# Altium PCB PCB1.PcbDoc (part 2 of 2)
Units mm, origin at the board's own origin, x right, y up, seen from the top; angles counter-clockwise.
Board outline 193 x 120 mm, 2 copper layers (Top Layer, Bottom Layer); 109 components, 163 nets, 596 pads, 0 vias.
Unrouted connection lines stored in the file: 2.
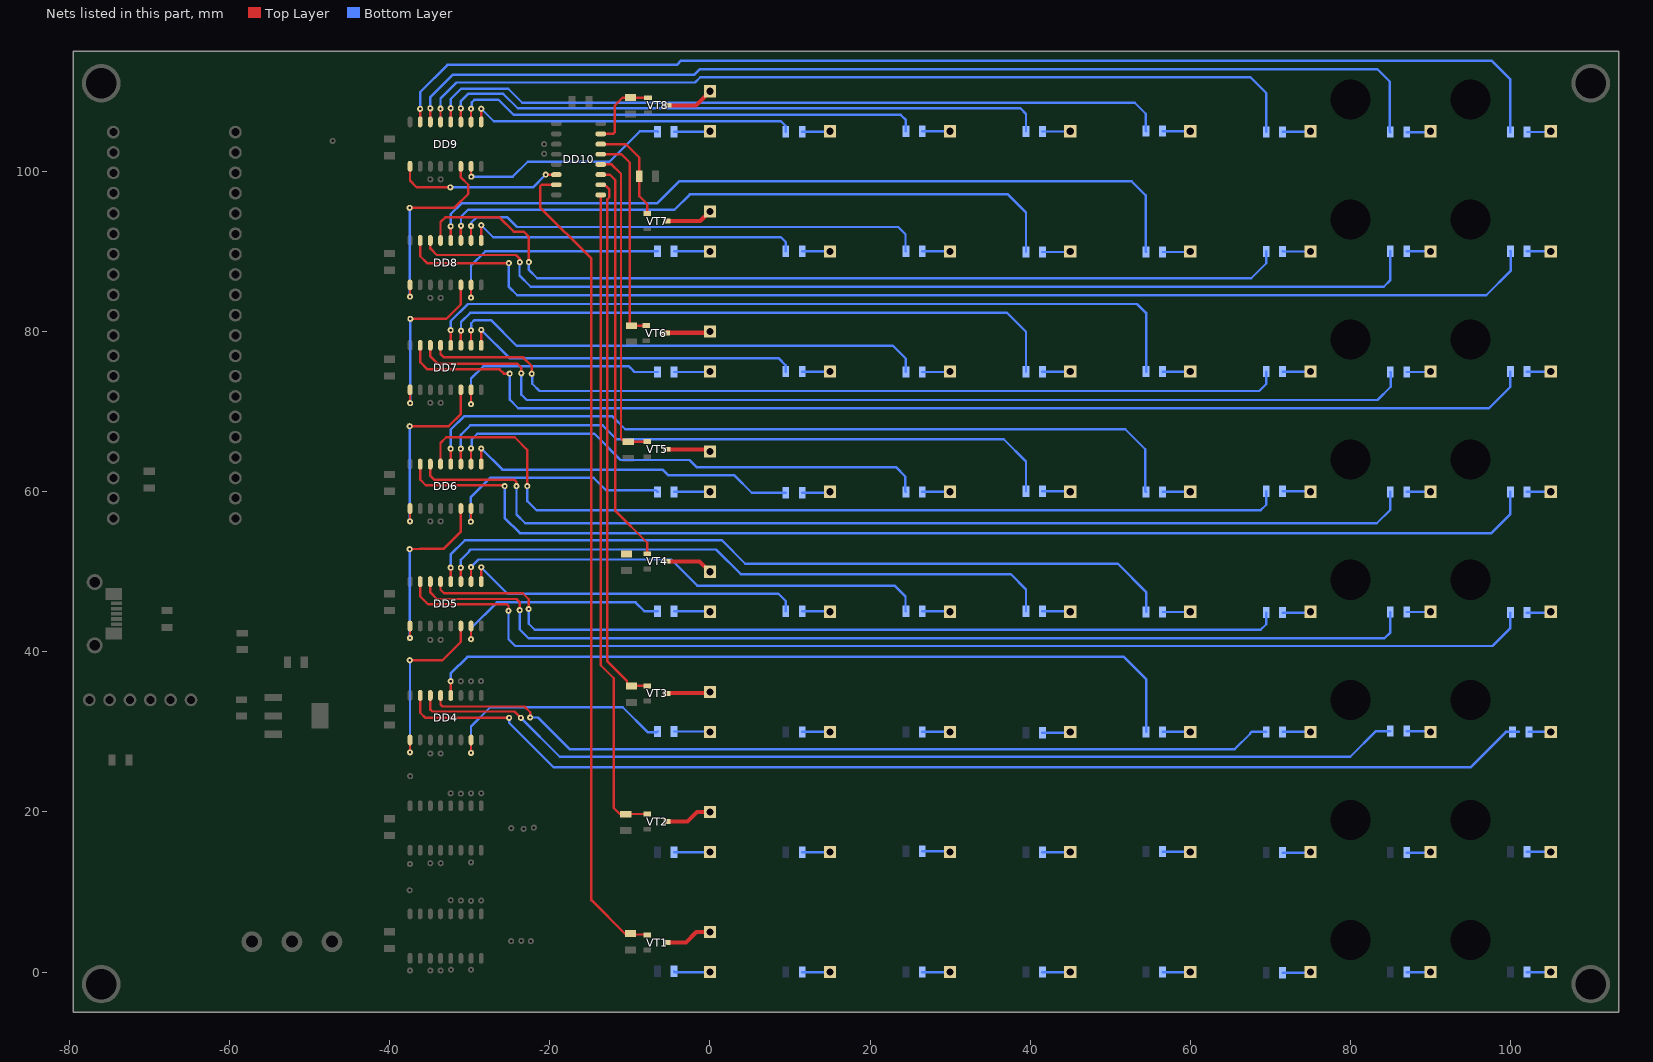
[diagram p2: the nets of this part, all layers, seen from the top]

## Nets (pads, with @x,y where several pads share a name; then routed paths per layer and width w, separated by ;. In a path a pad name is that pad's centre, name@x,y a point inside that pad or via, vN(x,y) a via of type N, cw(c..) or ccw(c..) an arc to the next point about the centre after c; other vN are vias at no path point) (continued)
NetDD4_4: DD4.4 pad.95@-32.375,36.325 R59.1 | length 98.2
  Top Layer w0.3: pad.95@-32.375,36.325 -32.365,36.115 DD4.4@-32.365,34.55
  Bottom Layer w0.3: pad.95@-32.375,36.325 -32.375,37.275 -30.275,39.375 51.7,39.375 54.475,36.6 R59.1@54.475,30
NetDD4_5: DD4.5 pad.95@-22.45,31.8 R61.1 | length 107.9
  Top Layer w0.3: DD4.5@-33.635,34.55 -33.635,33.41 -33.4,33.175 -23.15,33.175 -22.425,32.45 -22.425,31.825 pad.95@-22.45,31.8
  Bottom Layer w0.3: pad.95@-22.45,31.8 -21.475,31.8 -17.525,27.85 65.55,27.85 67.475,29.775 67.475,29.824 67.651,30 R61.1@69.475,30
NetDD4_6: DD4.6 pad.95@-23.6,31.75 R63.1 | length 125.4
  Top Layer w0.3: DD4.6@-34.905,34.55 -34.905,32.78 -34.675,32.55 -24.4,32.55 pad.95@-23.6,31.75
  Bottom Layer w0.3: pad.95@-23.6,31.75 -18.75,26.9 79.975,26.9 83.175,30.1 R63.1@84.975,30.1
NetDD4_7: DD4.7 pad.95@-25.075,31.75 R65.1 | length 144.4
  Top Layer w0.3: DD4.7@-36.175,34.55 -36.175,32.4 -35.525,31.75 pad.95@-25.075,31.75
  Bottom Layer w0.3: pad.95@-25.075,31.75 -25.075,31.15 -19.5,25.575 94.975,25.575 99.4,30 101.025,30
NetDD4_9: DD4.9 DD5.14 pad.95@-37.445,27.45 pad.95@-37.475,38.95 | length 22.6
  Top Layer w0.3: pad.95@-37.475,38.95 -33.4,38.95 -31.095,41.255 DD5.14@-31.095,43.225 ; pad.95@-37.445,27.45 DD4.9@-37.445,29
  Bottom Layer w0.3: pad.95@-37.475,38.95 pad.95@-37.445,38.95 ; pad.95@-37.445,27.45 pad.95@-37.445,38.95 ; pad.95@-37.445,38.95 -37.445,39.02 -37.375,38.95 pad.95@-37.445,38.95
NetDD4_15: DD4.15 pad.95@-29.825,27.375 R51.1 | length 30.5
  Top Layer w0.3: pad.95@-29.825,27.375 DD4.15@-29.825,29
  Bottom Layer w0.3: pad.95@-29.825,27.375 -29.825,30.675 -27.425,33.075 -10.875,33.075 -7.775,29.975 -6.6,29.975 R51.1@-6.525,30.05
NetDD5_1: DD5.1 pad.95@-28.55,50.55 R7.1 | length 42.9
  Top Layer w0.3: pad.95@-28.575,50.475 pad.95@-28.55,50.55 DD5.1@-28.555,48.775
  Bottom Layer w0.3: pad.95@-28.55,50.55 -25.25,47.25 8.575,47.25 9.475,46.35 R7.1@9.475,45.075
NetDD5_2: DD5.2 pad.95@-29.825,50.575 R10.1 | length 60.2
  Top Layer w0.3: DD5.2@-29.825,48.775 pad.95@-29.825,50.575
  Bottom Layer w0.3: pad.95@-29.825,50.575 -28.875,51.525 -4.825,51.525 -1.575,48.275 23.05,48.275 24.425,46.9 24.425,45.125 R10.1@24.475,45.075
NetDD5_3: DD5.3 pad.95@-31.095,50.505 R13.1 | length 78.7
  Top Layer w0.3: DD5.3@-31.095,48.775 pad.95@-31.095,50.505 pad.95@-31.075,50.525
  Bottom Layer w0.3: pad.95@-31.095,50.505 -31.095,51.505 -30.05,52.55 -30.05,52.599 -29.874,52.775 0.775,52.775 3.85,49.7 37.575,49.7 39.475,47.8 R13.1@39.475,45.075
NetDD5_4: DD5.4 pad.95@-32.365,50.515 R16.1 | length 96.2
  Top Layer w0.3: pad.95@-32.375,50.525 pad.95@-32.365,50.515 DD5.4@-32.365,48.775
  Bottom Layer w0.3: pad.95@-32.365,50.515 -32.375,50.525 -32.375,52.15 -30.6,53.925 1.5,53.925 4.425,51 50.95,51 54.475,47.475 R16.1@54.475,44.975
NetDD5_5: DD5.5 pad.95@-22.625,45.35 R19.1 | length 109.7
  Top Layer w0.3: DD5.5@-33.635,48.775 -33.635,47.76 -33.2,47.325 -23.375,47.325 -22.625,46.575 pad.95@-22.625,45.35
  Bottom Layer w0.3: pad.95@-22.625,45.35 -22.625,43.5 -21.875,42.75 68.775,42.75 69.475,43.45 R19.1@69.475,44.9
NetDD5_6: DD5.6 pad.95@-23.75,45.2 R22.1 | length 128.5
  Top Layer w0.3: DD5.6@-34.905,48.775 -34.905,47.405 -34.1,46.6 -24.15,46.6 -23.725,46.175 -23.725,45.225 pad.95@-23.75,45.2
  Bottom Layer w0.3: pad.95@-23.75,45.2 -23.75,42.8 -22.625,41.675 84.225,41.675 84.975,42.425 R22.1@84.975,44.975
NetDD5_7: DD5.7 pad.95@-25.15,45.125 R25.1 | length 145.9
  Top Layer w0.3: DD5.7@-36.175,48.775 -36.175,46.925 -35.2,45.95 -25.35,45.95 -25.15,45.75 pad.95@-25.15,45.125
  Bottom Layer w0.3: pad.95@-25.15,45.125 -25.15,41.575 -24.3,40.725 97.725,40.725 99.975,42.975 R25.1@99.975,44.9
NetDD5_9: DD5.9 DD6.14 pad.95@-37.5,52.825 pad.95@-37.45,41.725 | length 22.8
  Top Layer w0.3: pad.95@-37.5,52.825 -36.15,52.85 -33.275,52.85 -31.095,55.03 DD6.14@-31.095,57.9 ; pad.95@-37.45,41.725 -37.445,41.73 DD5.9@-37.445,43.225
  Bottom Layer w0.3: pad.95@-37.5,52.825 -37.475,41.75 pad.95@-37.45,41.725
NetDD5_15: DD5.15 pad.95@-29.825,41.575 R4.1 | length 28.1
  Top Layer w0.3: pad.95@-29.825,41.575 DD5.15@-29.825,43.225
  Bottom Layer w0.3: pad.95@-29.825,41.575 -29.825,42.95 -26.6,46.175 -9.275,46.175 -8.175,45.075 R4.1@-6.525,45.075
NetDD6_1: DD6.1 pad.95@-28.555,65.395 R31.1 | length 42.3
  Top Layer w0.3: DD6.1@-28.555,63.45 pad.95@-28.555,65.395 pad.95@-28.55,65.4
  Bottom Layer w0.3: pad.95@-28.555,65.395 -25.91,62.75 -5.9,62.75 -5.181,62.031 3.069,62.031 5.225,59.875 R31.1@9.475,59.875
NetDD6_2: DD6.2 pad.95@-29.825,65.4 R34.1 | length 61.7
  Top Layer w0.3: DD6.2@-29.825,63.45 pad.95@-29.825,65.4
  Bottom Layer w0.3: pad.95@-29.825,65.4 -29.75,65.475 -29.75,66.525 -29.05,67.225 -14.425,67.225 -11.15,63.95 -2.525,63.95 -1.65,63.075 23.225,63.075 24.4,61.9 24.4,60.05 R34.1@24.475,59.975
NetDD6_3: DD6.3 pad.95@-31.095,65.37 R37.1 | length 80.3
  Top Layer w0.3: pad.95@-31.1,65.375 pad.95@-31.095,65.37 DD6.3@-31.095,63.45
  Bottom Layer w0.3: pad.95@-31.095,65.37 -31.095,67.105 -29.925,68.275 -13.375,68.275 -11.65,66.55 36.7,66.55 39.475,63.775 R37.1@39.475,60.05
NetDD6_4: DD6.4 pad.95@-32.375,65.375 R40.1 | length 98.8
  Top Layer w0.3: pad.95@-32.375,65.375 -32.365,65.365 DD6.4@-32.365,63.45
  Bottom Layer w0.3: pad.95@-32.375,65.375 -32.375,67.725 -30.7,69.4 -12.175,69.4 -10.575,67.8 51.875,67.8 54.375,65.3 54.375,60.075 R40.1@54.475,59.975
NetDD6_5: DD6.5 pad.95@-22.8,60.7 R43.1 | length 115.5
  Top Layer w0.3: DD6.5@-33.635,63.45 -33.635,66.09 -32.925,66.8 -24.375,66.8 -22.8,65.225 pad.95@-22.8,60.7
  Bottom Layer w0.3: pad.95@-22.8,60.7 -22.8,58.825 -21.65,57.675 68.775,57.675 69.475,58.375 R43.1@69.475,60.05
NetDD6_6: DD6.6 pad.95@-24.15,60.7 R46.1 | length 129.1
  Top Layer w0.3: DD6.6@-34.905,63.45 -34.905,61.976 -34.429,61.5 -24.425,61.5 -24.15,61.225 pad.95@-24.15,60.7
  Bottom Layer w0.3: pad.95@-24.15,60.7 -24.15,57.15 -23.05,56.05 83.275,56.05 84.975,57.75 R46.1@84.975,59.975
NetDD6_7: DD6.7 pad.95@-25.625,60.7 R49.1 | length 146.9
  Top Layer w0.3: DD6.7@-36.175,63.45 -36.175,61.5 -35.475,60.8 -25.85,60.8 pad.95@-25.625,60.7
  Bottom Layer w0.3: pad.95@-25.625,60.7 -25.625,56.725 -23.725,54.825 97.6,54.825 99.975,57.2 R49.1@99.975,59.975
NetDD6_9: DD6.9 DD7.14 pad.95@-37.5,68.175 pad.95@-37.45,56.3 | length 23.5
  Top Layer w0.3: pad.95@-37.5,68.175 -32.625,68.175 -31.095,69.705 DD7.14@-31.095,72.725 ; pad.95@-37.45,56.3 -37.445,56.305 DD6.9@-37.445,57.9
  Bottom Layer w0.3: pad.95@-37.5,68.175 -37.475,56.325 pad.95@-37.45,56.3
NetDD6_15: DD6.15 pad.95@-29.85,56.25 R28.1 | length 29.8
  Top Layer w0.3: pad.95@-29.85,56.25 -29.825,56.275 DD6.15@-29.825,57.9
  Bottom Layer w0.3: pad.95@-29.85,56.25 -29.85,59.325 -27.45,61.725 -14.5,61.725 -12.95,60.175 -6.725,60.175 R28.1@-6.525,59.975
NetDD7_1: DD7.1 pad.95@-28.55,80.2 R54.1 | length 42.6
  Top Layer w0.3: DD7.1@-28.555,78.275 -28.555,80.195 pad.95@-28.55,80.2
  Bottom Layer w0.3: pad.95@-28.55,80.2 -25.025,76.675 8.575,76.675 9.475,75.775 R54.1@9.475,75
NetDD7_2: DD7.2 pad.95@-29.825,80.15 R56.1 | length 60.8
  Top Layer w0.3: DD7.2@-29.825,78.275 pad.95@-29.825,80.15
  Bottom Layer w0.3: pad.95@-29.825,80.15 -29.8,80.175 -29.8,81.025 -29.4,81.425 -27.35,81.425 -24.15,78.225 22.85,78.225 24.475,76.6 R56.1@24.475,74.95
NetDD7_3: DD7.3 pad.95@-31.075,80.1 R58.1 | length 79.9
  Top Layer w0.3: DD7.3@-31.095,78.275 -31.095,80.08 pad.95@-31.075,80.1
  Bottom Layer w0.3: pad.95@-31.075,80.1 -31.075,81.175 -29.9,82.35 37.1,82.35 39.476,79.974 39.476,77.75 ; R58.1@39.475,74.975 39.475,77.749
NetDD7_4: DD7.4 pad.95@-32.365,80.175 R60.1 | length 98.5
  Top Layer w0.3: DD7.4@-32.365,78.275 pad.95@-32.365,80.175
  Bottom Layer w0.3: pad.95@-32.365,80.175 -32.375,80.185 -32.375,81.275 -30.21,83.44 53.36,83.44 54.475,82.325 R60.1@54.475,75
NetDD7_5: DD7.5 pad.95@-22.25,74.725 R62.1 | length 109.3
  Top Layer w0.3: DD7.5@-33.635,78.275 -33.635,77.21 -33.2,76.775 -23.325,76.775 -22.25,75.7 pad.95@-22.25,74.725
  Bottom Layer w0.3: pad.95@-22.25,74.725 -22.175,74.65 -22.175,73.475 -21.275,72.575 68.6,72.575 69.475,73.45 R62.1@69.475,75
NetDD7_6: DD7.6 pad.95@-23.55,74.775 R64.1 | length 128.1
  Top Layer w0.3: DD7.6@-34.905,78.275 -34.905,76.88 -34.025,76 -24.05,76 -23.55,75.5 pad.95@-23.55,74.775
  Bottom Layer w0.3: pad.95@-23.55,74.775 -23.55,72.125 -22.875,71.45 83.375,71.45 85.025,73.1 85.025,74.9 R64.1@84.975,74.95
NetDD7_7: DD7.7 pad.95@-25,74.75 R66.1 | length 145.5
  Top Layer w0.3: DD7.7@-36.175,78.275 -36.175,76.175 -35.275,75.275 -26.25,75.275 -25.725,74.75 pad.95@-25,74.75
  Bottom Layer w0.3: pad.95@-25,74.75 -25,71.5 -23.925,70.425 97.3,70.425 99.975,73.1 R66.1@99.975,75
NetDD7_9: DD7.9 DD8.14 pad.95@-37.4,81.575 pad.95@-37.425,71.05 | length 21.7
  Top Layer w0.3: DD7.9@-37.445,72.725 -37.445,71.07 pad.95@-37.425,71.05 ; pad.95@-37.4,81.575 -37,81.6 -32.9,81.6 -31.095,83.405 DD8.14@-31.095,85.825
  Bottom Layer w0.3: pad.95@-37.425,71.05 -37.412,71.063 pad.95@-37.4,81.575
NetDD7_15: DD7.15 pad.95@-29.825,70.925 R52.1 | length 29.3
  Top Layer w0.3: DD7.15@-29.825,72.725 pad.95@-29.825,70.925 pad.95@-29.8,70.9
  Bottom Layer w0.3: pad.95@-29.825,70.925 -29.825,74.125 -28.3,75.65 -10.1,75.65 -9.951,75.501 -9.4,74.95 R52.1@-6.525,74.95
NetDD8_1: DD8.1 pad.95@-28.55,93.275 R8.1 | length 41.9
  Top Layer w0.3: DD8.1@-28.555,91.375 -28.555,93.27 pad.95@-28.55,93.275
  Bottom Layer w0.3: pad.95@-28.55,93.275 -27.05,91.775 8.875,91.775 9.475,91.175 R8.1@9.475,90.025
NetDD8_2: DD8.2 pad.95@-29.825,93.175 R11.1 | length 59.7
  Top Layer w0.3: DD8.2@-29.825,91.375 pad.95@-29.825,93.175
  Bottom Layer w0.3: pad.95@-29.825,93.175 -29.819,93.181 -29.819,93.581 -29.15,94.25 -25.275,94.25 -24.075,93.05 23.525,93.05 24.425,92.15 24.425,90.075 R11.1@24.475,90.025
NetDD8_3: DD8.3 pad.95@-31.075,93.2 R14.1 | length 80.6
  Top Layer w0.3: DD8.3@-31.095,91.375 -31.095,93.18 pad.95@-31.075,93.2
  Bottom Layer w0.3: pad.95@-31.075,93.2 -31.075,94.325 -30.2,95.2 -4.425,95.2 -2.5,97.125 37.225,97.125 39.475,94.875 R14.1@39.475,89.925
NetDD8_4: DD8.4 pad.95@-32.365,93.135 R17.1 | length 99.6
  Top Layer w0.3: DD8.4@-32.365,91.375 pad.95@-32.365,93.135 pad.95@-32.35,93.15
  Bottom Layer w0.3: pad.95@-32.365,93.135 -32.365,94.66 -31.025,96 -6.6,96 -3.85,98.75 52.675,98.75 54.425,97 54.425,89.975 R17.1@54.475,89.925
NetDD8_5: DD8.5 pad.95@-22.6,88.675 R20.1 | length 113.5
  Top Layer w0.3: DD8.5@-33.635,91.375 -33.635,93.665 -33.05,94.25 -26.275,94.25 -24.5,92.475 -23.25,92.475 -22.6,91.825 pad.95@-22.6,88.675
  Bottom Layer w0.3: pad.95@-22.6,88.675 -22.6,87.7 -21.55,86.65 67.6,86.65 69.475,88.525 R20.1@69.475,90
NetDD8_6: DD8.6 pad.95@-23.725,88.65 R23.1 | length 128.1
  Top Layer w0.3: DD8.6@-34.905,91.375 -34.905,90.355 -34.1,89.55 -24.201,89.55 -23.725,89.074 pad.95@-23.725,88.65
  Bottom Layer w0.3: pad.95@-23.725,88.65 -23.775,88.6 -23.775,87 -22.375,85.6 84.15,85.6 84.975,86.425 R23.1@84.975,90.025
NetDD8_7: DD8.7 pad.95@-25.1,88.55 R26.1 | length 145.6
  Top Layer w0.3: DD8.7@-36.175,91.375 -36.175,89.4 -35.325,88.55 pad.95@-25.1,88.55
  Bottom Layer w0.3: pad.95@-25.1,88.55 -25.1,85.575 -24.05,84.525 96.95,84.525 100,87.575 100,90 R26.1@99.975,90.025
NetDD8_9: DD8.9 DD9.14 pad.95@-37.5,95.45 pad.95@-37.445,84.355 | length 24.4
  Top Layer w0.3: pad.95@-37.5,95.45 -36.675,95.475 -31.875,95.475 -30.175,97.175 -30.175,98.325 -31.095,99.245 DD9.14@-31.095,100.625 ; pad.95@-37.445,84.355 DD8.9@-37.445,85.825
  Bottom Layer w0.3: pad.95@-37.5,95.45 -37.473,84.383 pad.95@-37.445,84.355
NetDD8_15: DD8.15 pad.95@-29.825,84.225 R5.1 | length 29.6
  Top Layer w0.3: pad.95@-29.825,84.225 DD8.15@-29.825,85.825
  Bottom Layer w0.3: pad.95@-29.825,84.225 -29.825,88.225 -28.025,90.025 R5.1@-6.525,90.025
NetDD9_1: DD9.1 pad.95@-28.552,107.822 R32.1 | length 41.3
  Top Layer w0.3: DD9.1@-28.555,106.175 -28.555,107.82 pad.95@-28.552,107.822 pad.95@-28.55,107.825
  Bottom Layer w0.3: pad.95@-28.552,107.822 -26.98,106.25 8.875,106.25 9.475,105.65 R32.1@9.475,104.95
NetDD9_2: DD9.2 pad.95@-29.825,107.825 R35.1 | length 59.3
  Top Layer w0.3: DD9.2@-29.825,106.175 pad.95@-29.825,107.825
  Bottom Layer w0.3: pad.95@-29.825,107.825 -29.737,107.913 -29.737,108.613 -29.4,108.95 -26.4,108.95 -24.525,107.075 23.825,107.075 24.475,106.425 R35.1@24.475,105
NetDD9_3: DD9.3 pad.95@-31.095,107.87 R38.1 | length 76.8
  Top Layer w0.3: pad.95@-31.1,107.875 pad.95@-31.095,107.87 DD9.3@-31.095,106.175
  Bottom Layer w0.3: pad.95@-31.095,107.87 -31.095,108.78 -30.2,109.675 -25.8,109.675 -24,107.875 38.775,107.875 39.475,107.175 R38.1@39.475,104.975
NetDD9_4: DD9.4 pad.95@-32.365,107.885 R41.1 | length 93.7
  Top Layer w0.3: DD9.4@-32.365,106.175 pad.95@-32.365,107.885 pad.95@-32.35,107.9
  Bottom Layer w0.3: pad.95@-32.365,107.885 -32.365,109.035 -31.074,110.326 -30.826,110.326 ; -30.825,110.325 -25.175,110.325 -23.425,108.575 53.05,108.575 54.425,107.2 54.425,105.075 R41.1@54.475,105.025
NetDD9_5: DD9.5 pad.95@-33.635,107.84 R44.1 | length 112.8
  Top Layer w0.3: DD9.5@-33.635,106.175 pad.95@-33.635,107.84 pad.95@-33.625,107.85
  Bottom Layer w0.3: pad.95@-33.635,107.84 -33.635,109.115 -31.65,111.1 -1.85,111.1 -1.2,111.75 67.5,111.75 69.5,109.75 69.5,104.95 R44.1@69.475,104.925
NetDD9_6: DD9.6 pad.95@-34.905,107.87 R47.1 | length 131.4
  Top Layer w0.3: DD9.6@-34.905,106.175 pad.95@-34.905,107.87 pad.95@-34.9,107.875
  Bottom Layer w0.3: pad.95@-34.905,107.87 -34.905,109.27 -32.125,112.05 -1.975,112.05 -1.25,112.775 83.35,112.775 84.925,111.2 84.925,104.95 R47.1@84.975,104.9
NetDD9_7: DD9.7 pad.95@-36.175,107.8 R50.1 | length 149
  Top Layer w0.3: DD9.7@-36.175,106.175 pad.95@-36.175,107.8
  Bottom Layer w0.3: pad.95@-36.175,107.8 -36.175,109.9 -32.775,113.3 -4.125,113.3 -3.6,113.825 97.625,113.825 99.975,111.475 R50.1@99.975,104.9
NetDD9_9: DD9.9 DD10.14 pad.95@-20.5,99.6 pad.95@-32.4,98 | length 21.1
  Top Layer w0.3: DD9.9@-37.445,100.625 -37.445,98.845 -36.6,98 pad.95@-32.4,98 ; pad.95@-20.5,99.6 -20.495,99.595 DD10.14@-19.175,99.595
  Bottom Layer w0.3: pad.95@-32.4,98 -22.1,98 pad.95@-20.5,99.6
NetDD9_15: DD9.15 pad.95@-29.787,99.338 R29.1 | length 27
  Top Layer w0.3: DD9.15@-29.825,100.625 -29.825,99.375 pad.95@-29.787,99.338 pad.95@-29.75,99.3
  Bottom Layer w0.3: pad.95@-29.787,99.338 -24.613,99.338 -22.75,101.2 -12.55,101.2 -8.75,105 -6.575,105 R29.1@-6.525,104.95
NetDD10_1: DD10.1 R68.2 VT2.1 | length 81.7
  Top Layer w0.3: DD10.1@-13.625,97.055 -13.625,38.325 -12,36.7 -12,20.5 -11.25,19.75 VT2.1@-7.825,19.75
NetDD10_2: DD10.2 R69.2 VT3.1 | length 66.8
  Top Layer w0.3: DD10.2@-13.625,98.325 -13.169,98.325 -13.019,98.175 -12.976,98.175 -12.546,97.745 -12.546,96.763 -12.8,96.509 -12.8,38.8 -10.343,36.343 -10.343,36 -10.068,35.725 R69.2@-9.8,35.725 -9.25,35.725 -9.248,35.75 -9.124,35.75 -8.15,35.75 VT3.1@-7.825,35.75
NetDD10_3: DD10.3 R70.2 VT4.1 | length 50.4
  Top Layer w0.3: DD10.3@-13.625,99.595 -12.495,99.595 -11.8,98.9 -11.8,57.6 -7.825,53.625 VT4.1@-7.825,52.25
NetDD10_4: DD10.4 R71.2 VT5.1 | length 39.5
  Top Layer w0.3: DD10.4@-13.625,100.865 -12.265,100.865 -11.1,99.7 -11.1,66.676 -10.924,66.5 -10.475,66.5 R71.2@-10.2,66.225 -10.188,66.238 -7.912,66.238 -7.875,66.2 VT5.1@-7.825,66.25
NetDD10_5: DD10.5 R72.2 VT6.1 | length 26.8
  Top Layer w0.3: DD10.5@-13.625,102.135 -11.035,102.135 -10,101.1 -10,80.925 R72.2@-9.8,80.725 -9.788,80.738 -7.937,80.738 VT6.1@-7.925,80.75 -8.1,80.75 VT6.1@-8.25,80.9
NetDD10_6: DD10.6 R73.2 VT7.1 | length 12.9
  Top Layer w0.3: DD10.6@-13.625,103.405 -10.505,103.405 -8.8,101.7 -8.8,96.9 -7.825,95.925 VT7.1@-7.825,94.75
NetDD10_7: DD10.7 R74.2 VT8.1 | length 9.7
  Top Layer w0.3: DD10.7@-13.625,104.675 -12.076,104.675 -11.9,104.851 -11.9,108.2 -10.9,109.2 VT8.1@-7.725,109.2
NetDD10_15: DD10.15 R67.2 VT1.1 | length 102.7
  Top Layer w0.3: DD10.15@-19.175,98.325 -21.024,98.325 -21.2,98.149 -21.2,95.5 -14.8,89.1 -14.8,9 -10.5,4.7 -7.875,4.7 VT1.1@-7.825,4.65
NetR3_2: pad.1 R3.2 | length 4.5
  Bottom Layer w0.3: R3.2@-4.475,0.1 -4.375,0 pad.1@0,0
NetR4_2: pad.25 R4.2 | length 4.5
  Bottom Layer w0.3: R4.2@-4.475,45.075 -0.075,45.075 pad.25@0,45
NetR5_2: pad.49 R5.2 | length 4.5
  Bottom Layer w0.3: R5.2@-4.475,90.025 -0.025,90.025 pad.49@0,90
NetR6_2: pad.2 R6.2 | length 3.5
  Bottom Layer w0.3: R6.2@11.525,0 pad.2@15,0
NetR7_2: pad.26 R7.2 | length 3.5
  Bottom Layer w0.3: R7.2@11.525,45.075 14.925,45.075 pad.26@15,45
NetR8_2: pad.50 R8.2 | length 3.5
  Bottom Layer w0.3: R8.2@11.525,90.025 14.975,90.025 pad.50@15,90
NetR9_2: pad.3 R9.2 | length 3.5
  Bottom Layer w0.3: R9.2@26.525,0 pad.3@30,0
NetR10_2: pad.27 R10.2 | length 3.5
  Bottom Layer w0.3: R10.2@26.525,45.075 29.925,45.075 pad.27@30,45
NetR11_2: pad.51 R11.2 | length 3.5
  Bottom Layer w0.3: R11.2@26.525,90.025 29.975,90.025 pad.51@30,90
NetR12_2: pad.4 R12.2 | length 3.5
  Bottom Layer w0.3: R12.2@41.525,0 pad.4@45,0
NetR13_2: pad.28 R13.2 | length 3.5
  Bottom Layer w0.3: R13.2@41.525,45.075 44.925,45.075 pad.28@45,45
NetR14_2: pad.52 R14.2 | length 3.5
  Bottom Layer w0.3: R14.2@41.525,89.925 44.925,89.925 pad.52@45,90
NetR15_2: pad.5 R15.2 | length 3.5
  Bottom Layer w0.3: R15.2@56.525,0 pad.5@60,0
NetR16_2: pad.29 R16.2 | length 3.5
  Bottom Layer w0.3: R16.2@56.525,44.975 59.975,44.975 pad.29@60,45
NetR17_2: pad.53 R17.2 | length 3.5
  Bottom Layer w0.3: R17.2@56.525,89.925 59.925,89.925 pad.53@60,90
NetR18_2: pad.6 R18.2 | length 3.5
  Bottom Layer w0.3: R18.2@71.525,-0.075 74.925,-0.075 pad.6@75,0
NetR19_2: pad.30 R19.2 | length 3.5
  Bottom Layer w0.3: R19.2@71.525,44.9 74.9,44.9 pad.30@75,45
NetR20_2: pad.54 R20.2 | length 3.5
  Bottom Layer w0.3: R20.2@71.525,90 pad.54@75,89.975
NetR21_2: pad.7 R21.2 | length 3
  Bottom Layer w0.3: R21.2@87.025,0 pad.7@90,0
NetR22_2: pad.31 R22.2 | length 3
  Bottom Layer w0.3: R22.2@87.025,44.975 89.975,44.975 pad.31@90,45
NetR23_2: pad.55 R23.2 | length 3
  Bottom Layer w0.3: R23.2@87.025,90.025 pad.55@90,90
NetR24_2: pad.8 R24.2 | length 3
  Bottom Layer w0.3: R24.2@102.025,0 pad.8@105,0
NetR25_2: pad.32 R25.2 | length 3
  Bottom Layer w0.3: R25.2@102.025,44.9 104.9,44.9 pad.32@105,45
NetR26_2: pad.56 R26.2 | length 3
  Bottom Layer w0.3: R26.2@102.025,90.025 pad.56@105,90
NetR27_2: pad.9 R27.2 | length 4.5
  Bottom Layer w0.3: R27.2@-4.475,14.975 -0.025,14.975 pad.9@0,15
NetR28_2: pad.33 R28.2 | length 4.5
  Bottom Layer w0.3: R28.2@-4.475,59.975 -4.45,60 pad.33@0,60
NetR29_2: pad.57 R29.2 | length 4.5
  Bottom Layer w0.3: R29.2@-4.475,104.95 -0.05,104.95 pad.57@0,105
NetR30_2: pad.10 R30.2 | length 3.5
  Bottom Layer w0.3: R30.2@11.525,14.975 14.975,14.975 pad.10@15,15
NetR31_2: pad.34 R31.2 | length 3.5
  Bottom Layer w0.3: R31.2@11.525,59.875 14.875,59.875 pad.34@15,60
NetR32_2: pad.58 R32.2 | length 3.5
  Bottom Layer w0.3: R32.2@11.525,104.95 14.95,104.95 pad.58@15,105
NetR33_2: pad.11 R33.2 | length 3.5
  Bottom Layer w0.3: R33.2@26.525,15.1 29.9,15.1 pad.11@30,15
NetR34_2: pad.35 R34.2 | length 3.5
  Bottom Layer w0.3: R34.2@26.525,59.975 29.975,59.975 pad.35@30,60
NetR35_2: pad.59 R35.2 | length 3.5
  Bottom Layer w0.3: R35.2@26.525,105 pad.59@30,105
NetR36_2: pad.12 R36.2 | length 3.5
  Bottom Layer w0.3: R36.2@41.525,14.975 44.975,14.975 pad.12@45,15
NetR37_2: pad.36 R37.2 | length 3.5
  Bottom Layer w0.3: R37.2@41.525,60.05 44.95,60.05 pad.36@45,60
NetR38_2: pad.60 R38.2 | length 3.5
  Bottom Layer w0.3: R38.2@41.525,104.975 44.975,104.975 pad.60@45,105
NetR39_2: pad.13 R39.2 | length 3.5
  Bottom Layer w0.3: R39.2@56.525,15.05 59.95,15.05 pad.13@60,15
NetR40_2: pad.37 R40.2 | length 3.5
  Bottom Layer w0.3: R40.2@56.525,59.975 59.975,59.975 pad.37@60,60
NetR41_2: pad.61 R41.2 | length 3.5
  Bottom Layer w0.3: R41.2@56.525,105.025 59.975,105.025 pad.61@60,105
NetR42_2: pad.14 R42.2 | length 3.5
  Bottom Layer w0.3: R42.2@71.525,14.925 74.925,14.925 pad.14@75,15
NetR43_2: pad.38 R43.2 | length 3.5
  Bottom Layer w0.3: R43.2@71.525,60.05 74.95,60.05 pad.38@75,60
NetR44_2: pad.62 R44.2 | length 3.5
  Bottom Layer w0.3: R44.2@71.525,104.925 74.925,104.925 pad.62@75,105
NetR45_2: pad.15 R45.2 | length 3
  Bottom Layer w0.3: R45.2@87.025,14.925 89.925,14.925 pad.15@90,15
NetR46_2: pad.39 R46.2 | length 3
  Bottom Layer w0.3: R46.2@87.025,59.975 89.975,59.975 pad.39@90,60
NetR47_2: pad.63 R47.2 | length 3
  Bottom Layer w0.3: R47.2@87.025,104.9 89.9,104.9 pad.63@90,105
NetR48_2: pad.16 R48.2 | length 3
  Bottom Layer w0.3: R48.2@102.025,15.025 104.975,15.025 pad.16@105,15
NetR49_2: pad.40 R49.2 | length 3
  Bottom Layer w0.3: R49.2@102.025,59.975 104.975,59.975 pad.40@105,60
NetR50_2: pad.64 R50.2 | length 3
  Bottom Layer w0.254: R50.2@102.025,104.9 104.9,104.9 pad.64@105,105
NetR51_2: pad.17 R51.2 | length 4.5
  Bottom Layer w0.3: R51.2@-4.475,30.05 -0.05,30.05 pad.17@0,30
NetR52_2: pad.41 R52.2 | length 4.5
  Bottom Layer w0.3: R52.2@-4.475,74.95 -0.05,74.95 pad.41@0,75
NetR53_2: pad.18 R53.2 | length 3.5
  Bottom Layer w0.3: R53.2@11.525,30 pad.18@15,30
NetR54_2: pad.42 R54.2 | length 3.5
  Bottom Layer w0.3: R54.2@11.525,75 pad.42@15,75
NetR55_2: pad.19 R55.2 | length 3.5
  Bottom Layer w0.3: R55.2@26.525,30 pad.19@30,30
NetR56_2: pad.43 R56.2 | length 3.5
  Bottom Layer w0.3: R56.2@26.525,74.95 29.95,74.95 pad.43@30,75
NetR57_2: pad.20 R57.2 | length 3.5
  Bottom Layer w0.3: R57.2@41.525,29.9 44.9,29.9 pad.20@45,30
NetR58_2: pad.44 R58.2 | length 3.5
  Bottom Layer w0.3: R58.2@41.525,74.975 44.975,74.975 pad.44@45,75
NetR59_2: pad.21 R59.2 | length 3.5
  Bottom Layer w0.3: R59.2@56.525,30 pad.21@60,30
NetR60_2: pad.45 R60.2 | length 3.5
  Bottom Layer w0.3: R60.2@56.525,75 pad.45@60,75
NetR61_2: pad.22 R61.2 | length 3.5
  Bottom Layer w0.3: R61.2@71.525,30 pad.22@75,30
NetR62_2: pad.46 R62.2 | length 3.5
  Bottom Layer w0.3: R62.2@71.525,75 pad.46@75,75
NetR63_2: pad.23 R63.2 | length 3
  Bottom Layer w0.3: R63.2@87.025,30.1 89.9,30.1 pad.23@90,30
NetR64_2: pad.47 R64.2 | length 3
  Bottom Layer w0.3: R64.2@87.025,74.95 89.95,74.95 pad.47@90,75
NetR65_2: pad.24 R65.2 | length 2.7
  Bottom Layer w0.3: R65.2@102.275,30 pad.24@105,30
NetR66_2: pad.48 R66.2 | length 3
  Bottom Layer w0.3: R66.2@102.025,75 pad.48@105,75
NetVT1_3: pad.65 VT1.3 | length 5.9
  Top Layer w0.51: VT1.3@-5.375,3.7 -3,3.7 -1.7,5 pad.65@0,5
NetVT2_3: pad.66 VT2.3 | length 5.9
  Top Layer w0.51: VT2.3@-5.375,18.8 -2.8,18.8 -1.6,20 pad.66@0,20
NetVT3_3: pad.67 VT3.3 | length 5.5
  Top Layer w0.51: VT3.3@-5.375,34.8 -5.33,34.845 -0.155,34.845 pad.67@0,35
NetVT4_3: pad.68 VT4.3 | length 5.9
  Top Layer w0.51: VT4.3@-5.375,51.3 -1.3,51.3 pad.68@0,50
NetVT5_3: pad.69 VT5.3 | length 5.5
  Top Layer w0.51: VT5.3@-5.375,65.3 -5.33,65.255 -0.255,65.255 pad.69@0,65
NetVT6_3: pad.70 VT6.3 | length 5.6
  Top Layer w0.51: VT6.3@-5.475,79.8 -5.43,79.845 -0.155,79.845 pad.70@0,80
NetVT7_3: pad.71 VT7.3 | length 5.9
  Top Layer w0.51: VT7.3@-5.375,93.8 -1.2,93.8 pad.71@0,95
NetVT8_3: pad.72 VT8.3 | length 6
  Top Layer w0.51: VT8.3@-5.275,108.25 -1.75,108.25 pad.72@0,110
pads on no net: DD1.1 DD1.2 DD1.3 DD1.4 DD1.9 DD1.10 DD1.11 DD1.12 DD1.13 DD1.17 DD1.18 DD1.21 DD1.24 DD1.25 DD1.26 DD1.27 DD1.28 DD1.29 DD1.30 DD1.31 DD1.32 DD1.33 DD1.34 DD1.35 DD1.36 DD1.37 DD1.38 DD1.39 DD1.40 DD10.9 U1.1 U1.6 XS1.2 XS1.3 XS1.4

## Polygon pours and split planes (outlines as drawn)
GND on Top Layer "GND_L01_P002" (solid, pour order 2): -79.5,-5 113.5,-5 113.5,115 -79.5,115
GND on Bottom Layer "GND_L02_P004" (solid, pour order 4): -79.5,-5 113.5,-5 113.5,115 -79.5,115

## Keep-outs
Keep-Out Layer:
  the board outline again, w0.254

## Silkscreen, mask and mechanical layers (free items; w line width, h text height)
Top Overlay:
  text "Z8" at 3,109 h1.52
  text "L88" at 107,104.3 h1.52
  text "L81" at 3,104 h1.52
  text "L82" at 17,104 h1.52
  text "L83" at 32,104 h1.52
  text "L84" at 47,104 h1.52
  text "L85" at 62,104 h1.52
  text "L86" at 77,104 h1.52
  text "L87" at 92,104 h1.52
  text "Z7" at 3,94 h1.52
  text "L78" at 107,89.3 h1.52
  text "L71" at 3,89 h1.52
  text "L72" at 17,89 h1.52
  text "L73" at 32,89 h1.52
  text "L74" at 47,89 h1.52
  text "L75" at 62,89 h1.52
  text "L76" at 77,89 h1.52
  text "L77" at 92,89 h1.52
  text "Z6" at 3,79 h1.52
  text "L68" at 107,74.3 h1.52
  text "L61" at 3,74 h1.52
  text "L62" at 17,74 h1.52
  text "L63" at 32,74 h1.52
  text "L64" at 47,74 h1.52
  text "L65" at 62,74 h1.52
  text "L66" at 77,74 h1.52
  text "L67" at 92,74 h1.52
  text "Z5" at 3,64 h1.52
  text "L58" at 107,59.3 h1.52
  text "L51" at 3,59 h1.52
  text "L52" at 17,59 h1.52
  text "L53" at 32,59 h1.52
  text "L54" at 47,59 h1.52
  text "L55" at 62,59 h1.52
  text "L56" at 77,59 h1.52
  text "L57" at 92,59 h1.52
  text "Z4" at 3,49 h1.52
  text "L48" at 107,44.3 h1.52
  text "L41" at 3,44 h1.52
  text "L42" at 17,44 h1.52
  text "L43" at 32,44 h1.52
  text "L44" at 47,44 h1.52
  text "L45" at 62,44 h1.52
  text "L46" at 77,44 h1.52
  text "L47" at 92,44 h1.52
  text "Z3" at 3,34 h1.52
  text "L38" at 107,29.3 h1.52
  text "L31" at 3,29 h1.52
  text "L32" at 17,29 h1.52
  text "L33" at 32,29 h1.52
  text "L34" at 47,29 h1.52
  text "L35" at 62,29 h1.52
  text "L36" at 77,29 h1.52
  text "L37" at 92,29 h1.52
  text "Z2" at 3,19 h1.52
  text "L28" at 107,14.3 h1.52
  text "L21" at 3,14 h1.52
  text "L22" at 17,14 h1.52
  text "L23" at 32,14 h1.52
  text "L24" at 47,14 h1.52
  text "L25" at 62,14 h1.52
  text "L26" at 77,14 h1.52
  text "L27" at 92,14 h1.52
  text "Z1" at 3,4 h1.52
  text "L18" at 106,1.5 h1.52
  text "L11" at 3,-1 h1.52
  text "L12" at 17,-1 h1.52
  text "L13" at 32,-1 h1.52
  text "L14" at 47,-1 h1.52
  text "L15" at 62,-1 h1.52
  text "L16" at 77,-1 h1.52
  text "L17" at 92,-1 h1.52

## Text inside footprints (layer, text, board x,y; h text height)
DD1: Top Overlay "G" at -56.212,102.106 h2.03 r90; Top Overlay "G" at -56.212,104.646 h2.03 r90; Top Overlay "VB" at -56.212,55.878 h2.03 r90; Top Overlay "C13" at -56.212,58.418 h2.03 r90; Top Overlay "C14" at -56.212,60.958 h2.03 r90; Top Overlay "C15" at -56.212,63.498 h2.03 r90; Top Overlay "A0" at -56.212,66.038 h2.03 r90; Top Overlay "A1" at -56.212,68.578 h2.03 r90; Top Overlay "A2" at -56.212,71.118 h2.03 r90; Top Overlay "A3" at -56.212,73.912 h2.03 r90; Top Overlay "A4" at -56.212,76.198 h2.03 r90; Top Overlay "A5" at -56.212,78.738 h2.03 r90; Top Overlay "A6" at -56.212,81.278 h2.03 r90; Top Overlay "A7" at -56.212,83.564 h2.03 r90; Top Overlay "B0" at -56.212,86.358 h2.03 r90; Top Overlay "B1" at -56.212,88.898 h2.03 r90; Top Overlay "B10" at -56.212,91.438 h2.03 r90; Top Overlay "B11" at -56.212,94.232 h2.03 r90; Top Overlay "R" at -56.212,97.026 h2.03 r90; Top Overlay "3.3" at -56.212,99.058 h2.03 r90; Top Overlay "B14" at -76.024,99.058 h2.03 r90; Top Overlay "B15" at -76.024,96.264 h2.03 r90; Top Overlay "A8" at -76.024,93.978 h2.03 r90; Top Overlay "A9" at -76.024,91.438 h2.03 r90; Top Overlay "A10" at -76.024,88.898 h2.03 r90; Top Overlay "A11" at -76.024,86.358 h2.03 r90; Top Overlay "A12" at -76.024,83.564 h2.03 r90; Top Overlay "A15" at -76.024,81.024 h2.03 r90; Top Overlay "B3" at -76.024,78.992 h2.03 r90; Top Overlay "B4" at -76.024,76.452 h2.03 r90; Top Overlay "B5" at -76.024,73.658 h2.03 r90; Top Overlay "B6" at -76.024,71.118 h2.03 r90; Top Overlay "B7" at -76.024,68.578 h2.03 r90; Top Overlay "B8" at -76.024,66.038 h2.03 r90; Top Overlay "B9" at -76.024,63.498 h2.03 r90; Top Overlay "5V" at -76.024,60.958 h2.03 r90; Top Overlay "G" at -76.024,58.926 h2.03 r90; Top Overlay "3.3" at -76.024,55.878 h2.03 r90; Top Overlay "B12" at -76.024,104.138 h2.03 r90; Top Overlay "B13" at -76.024,101.598 h2.03 r90
U1: Top Overlay "STATE" at -65.3,32.5 h1.52 r270; Top Overlay "RX" at -67.8,32.5 h1.52 r270; Top Overlay "TX" at -70.3,32.5 h1.52 r270; Top Overlay "GND" at -72.8,32.5 h1.52 r270; Top Overlay "VCC" at -75.6,32.5 h1.52 r270; Top Overlay "KEY" at -78.1,32.5 h1.52 r270